# Altium PCB AT89S52单片机入门与提高_粗.PcbDoc (part 4 of 5)
Units mm, origin at the board's own origin, x right, y up, seen from the top; angles counter-clockwise.
Board outline 152.4 x 101.6 mm, 2 copper layers (Top Layer, Bottom Layer); 111 components, 112 nets, 451 pads, 42 vias.
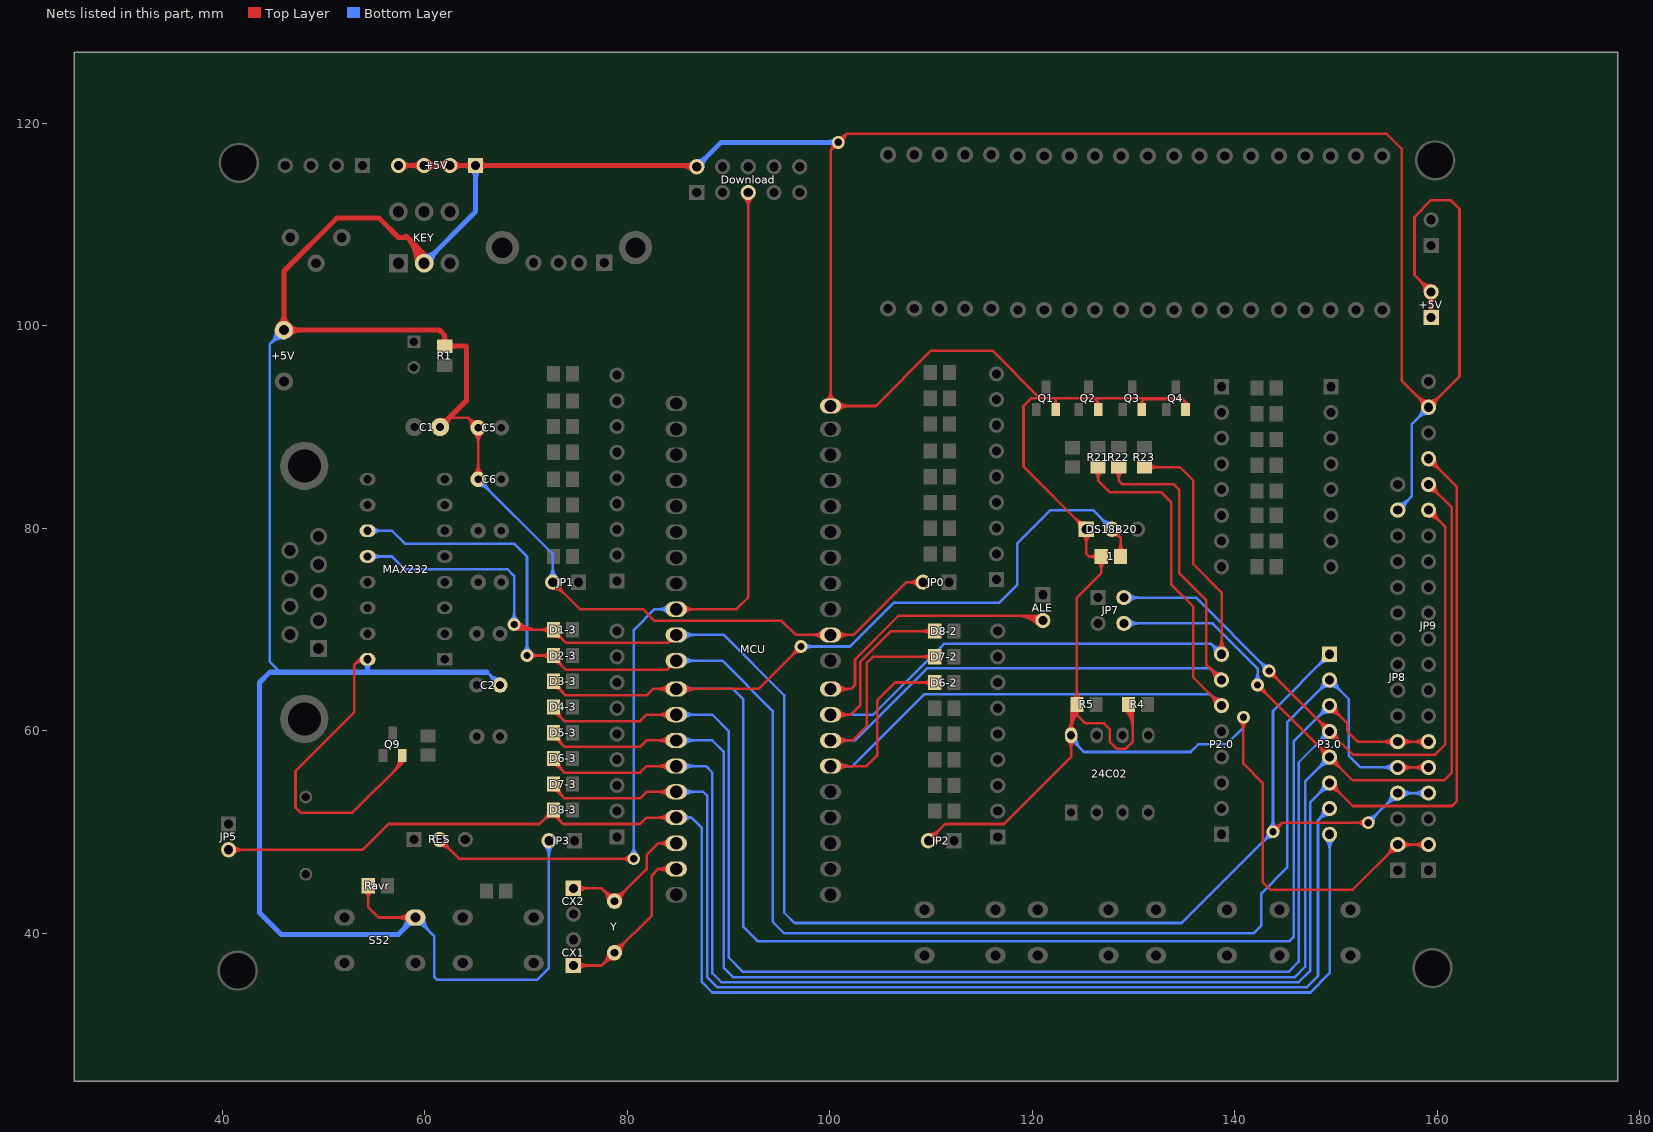
[diagram p4: the nets of this part, all layers, seen from the top]

## Via types
v1: diameter 1.27, hole 0.711, Top Layer to Bottom Layer, 42 vias

## Nets (pads, with @x,y where several pads share a name; then routed paths per layer and width w, separated by ;. In a path a pad name is that pad's centre, name@x,y a point inside that pad or via, vN(x,y) a via of type N, cw(c..) or ccw(c..) an arc to the next point about the centre after c; other vN are vias at no path point) (continued)
P2.5: D6-2.2 MCU.26 P2.0.6 R21.1 | length 117.1
  Top Layer w0.254: MCU.26@100.076,56.515 103.632,56.515 104.673,57.556 104.673,62.992 106.451,64.77 D6-2.2@110.368,64.77 ; MCU.26@100.639,56.252 cw(c101.273,55.618) 101.273,56.515 cw(c101.273,57.412) MCU.26@100.639,56.778 ; MCU.26@100.818,56.073 cw(c101.886,55.005) 101.886,56.515 cw(c101.886,58.025) MCU.26@100.818,56.957 ; D6-2.2@109.998,64.4 ccw(c109.105,63.507) 109.105,64.77 ccw(c109.105,66.033) D6-2.2@109.998,65.14 ; R21.1@126.122,85.675 cw(c125.229,84.782) 126.492,84.782 cw(c127.755,84.782) R21.1@126.862,85.675 ; R21.1@126.492,86.045 126.492,84.709 127.635,83.566 132.715,83.566 133.731,82.55 133.731,74.422 135.89,72.263 135.89,65.278 P2.0.6@138.684,62.484 ; P2.0.6@138.061,62.484 ccw(c136.557,62.484) 137.62,63.548 ccw(c138.684,64.611) P2.0.6@138.684,63.107 ; P2.0.6@138.315,62.484 ccw(c137.424,62.484) 138.054,63.114 ccw(c138.684,63.744) P2.0.6@138.684,62.853
  Bottom Layer w0.254: MCU.26@100.076,56.515 102.235,56.515 109.347,63.627 137.541,63.627 P2.0.6@138.684,62.484 ; 101.273,56.515 ccw(c101.273,55.618) 100.639,56.252 cw(c101.273,55.618) 101.273,56.515 ; 101.273,56.515 cw(c101.273,57.412) 100.639,56.778 ccw(c101.273,57.412) 101.273,56.515 ; 101.886,56.515 ccw(c101.886,55.005) 100.818,56.073 cw(c101.886,55.005) 101.886,56.515 ; 101.886,56.515 cw(c101.886,58.025) 100.818,56.957 ccw(c101.886,58.025) 101.886,56.515 ; 137.62,63.548 ccw(c138.684,64.611) 138.684,63.107 cw(c138.684,64.611) 137.62,63.548 ; 137.62,63.548 cw(c136.557,62.484) 138.061,62.484 ccw(c136.557,62.484) 137.62,63.548 ; 138.054,63.114 ccw(c138.684,63.744) 138.684,62.853 cw(c138.684,63.744) 138.054,63.114 ; 138.054,63.114 cw(c137.424,62.484) 138.315,62.484 ccw(c137.424,62.484) 138.054,63.114
P2.6: D7-2.2 MCU.27 P2.0.7 R22.1 | length 114.2
  Top Layer w0.254: MCU.27@100.076,59.055 102.235,59.055 103.632,60.452 103.632,66.675 104.267,67.31 D7-2.2@110.368,67.31 ; MCU.27@100.639,58.792 cw(c101.273,58.158) 101.273,59.055 cw(c101.273,59.952) MCU.27@100.639,59.318 ; MCU.27@100.818,58.613 cw(c101.886,57.545) 101.886,59.055 cw(c101.886,60.565) MCU.27@100.818,59.497 ; D7-2.2@109.998,66.94 ccw(c109.105,66.047) 109.105,67.31 ccw(c109.105,68.573) D7-2.2@109.998,67.68 ; R22.1@128.154,85.675 cw(c127.261,84.782) 128.524,84.782 cw(c129.787,84.782) R22.1@128.894,85.675 ; R22.1@128.524,86.045 128.524,84.709 128.905,84.328 133.985,84.328 134.493,83.82 134.493,75.565 137.16,72.898 137.16,66.548 P2.0.7@138.684,65.024 ; P2.0.7@138.061,65.024 ccw(c136.557,65.024) 137.62,66.088 ccw(c138.684,67.151) P2.0.7@138.684,65.647 ; P2.0.7@138.315,65.024 ccw(c137.424,65.024) 138.054,65.654 ccw(c138.684,66.284) P2.0.7@138.684,65.393
  Bottom Layer w0.254: MCU.27@100.076,59.055 102.489,59.055 109.601,66.167 137.541,66.167 P2.0.7@138.684,65.024 ; 101.273,59.055 ccw(c101.273,58.158) 100.639,58.792 cw(c101.273,58.158) 101.273,59.055 ; 101.273,59.055 cw(c101.273,59.952) 100.639,59.318 ccw(c101.273,59.952) 101.273,59.055 ; 101.886,59.055 ccw(c101.886,57.545) 100.818,58.613 cw(c101.886,57.545) 101.886,59.055 ; 101.886,59.055 cw(c101.886,60.565) 100.818,59.497 ccw(c101.886,60.565) 101.886,59.055 ; 137.62,66.088 ccw(c138.684,67.151) 138.684,65.647 cw(c138.684,67.151) 137.62,66.088 ; 137.62,66.088 cw(c136.557,65.024) 138.061,65.024 ccw(c136.557,65.024) 137.62,66.088 ; 138.054,65.654 ccw(c138.684,66.284) 138.684,65.393 cw(c138.684,66.284) 138.054,65.654 ; 138.054,65.654 cw(c137.424,65.024) 138.315,65.024 ccw(c137.424,65.024) 138.054,65.654
P2.7: D8-2.2 MCU.28 P2.0.8 R23.1 | length 107.9
  Top Layer w0.254: MCU.28@100.076,61.595 102.108,61.595 102.997,62.484 102.997,66.802 106.045,69.85 D8-2.2@110.368,69.85 ; MCU.28@100.639,61.332 cw(c101.273,60.698) 101.273,61.595 cw(c101.273,62.492) MCU.28@100.639,61.858 ; MCU.28@100.818,61.153 cw(c101.886,60.085) 101.886,61.595 cw(c101.886,63.105) MCU.28@100.818,62.037 ; D8-2.2@109.998,69.48 ccw(c109.105,68.587) 109.105,69.85 ccw(c109.105,71.113) D8-2.2@109.998,70.22 ; R23.1@131.064,86.045 134.554,86.045 135.89,84.709 135.89,76.454 138.684,73.66 P2.0.8@138.684,67.564 ; R23.1@131.534,85.675 cw(c132.427,84.782) 132.427,86.045 cw(c132.427,87.308) R23.1@131.534,86.415 ; P2.0.8@138.243,68.005 ccw(c137.18,69.068) 138.684,69.068 ccw(c140.188,69.068) P2.0.8@139.125,68.005 ; P2.0.8@138.423,67.825 ccw(c137.793,68.455) 138.684,68.455 ccw(c139.575,68.455) P2.0.8@138.945,67.825
  Bottom Layer w0.254: MCU.28@100.076,61.595 104.292,61.595 111.277,68.58 137.668,68.58 ; P2.0.8@138.684,67.564 137.668,68.58 ; 101.273,61.595 ccw(c101.273,60.698) 100.639,61.332 cw(c101.273,60.698) 101.273,61.595 ; 101.273,61.595 cw(c101.273,62.492) 100.639,61.858 ccw(c101.273,62.492) 101.273,61.595 ; 101.886,61.595 ccw(c101.886,60.085) 100.818,61.153 cw(c101.886,60.085) 101.886,61.595 ; 101.886,61.595 cw(c101.886,63.105) 100.818,62.037 ccw(c101.886,63.105) 101.886,61.595 ; 137.668,68.58 ccw(c138.619,69.531) 138.664,68.187 cw(c138.619,69.531) 137.668,68.58 ; 137.668,68.58 cw(c136.717,67.629) 138.061,67.584 ccw(c136.717,67.629) 137.668,68.58 ; 138.082,68.166 ccw(c138.646,68.729) 138.672,67.933 cw(c138.646,68.729) 138.082,68.166 ; 138.082,68.166 cw(c137.519,67.602) 138.315,67.576 ccw(c137.519,67.602) 138.082,68.166
P3.0: D1-3.2 JP8.4 JP9.4 MAX232.12 MCU.10 P3.0.1 | length 233.9
  Top Layer w0.254: v1@68.654,70.305 ccw(c69.447,71.098) 69.447,69.977 ; v1@69.014,70.665 ccw(c70.674,72.325) 70.674,69.977 ; v1@69.193,70.844 ccw(c71.287,72.938) 71.287,69.977 ; 70.06,69.977 cw(c70.06,71.711) v1(68.834,70.485) 69.342,69.977 ; D1-3.2@72.34,69.607 ccw(c71.447,68.714) 71.447,69.977 ccw(c71.447,71.24) D1-3.2@72.34,70.347 ; D1-3.2@72.71,69.354 cw(c72.71,68.009) 73.661,68.96 ; D1-3.2@72.71,69.608 cw(c72.71,68.876) D1-3.2@73.227,69.394 ; D1-3.2@73.233,69.877 ccw(c74.414,69.877) 73.579,69.042 ; MCU.10@84.832,69.468 84.071,68.707 73.914,68.707 72.71,69.911 D1-3.2@72.71,69.977 69.342,69.977 ; v1(143.764,50.038) 144.653,50.927 v1(153.162,50.927) ; v1@143.764,50.546 ccw(c143.764,51.772) 144.631,50.905 ccw(c145.498,50.038) v1@144.272,50.038 ; v1@152.803,50.568 ccw(c151.936,49.701) 151.936,50.927 ccw(c151.936,52.153) v1@152.803,51.286 ; 69.342,69.977 ccw(c69.162,69.797) 69.053,70.027 cw(c69.162,69.797) 69.342,69.977 ; 69.342,69.977 cw(c69.522,70.157) 69.292,70.266 ccw(c69.522,70.157) 69.342,69.977
  Bottom Layer w0.254: MAX232.12@54.36,77.217 56.768,77.217 58.039,75.946 68.199,75.946 68.834,75.311 v1(68.834,70.485) ; MCU.10@84.832,69.468 89.536,69.468 95.504,63.5 95.504,42.037 96.52,41.021 134.747,41.021 v1(143.764,50.038) 143.764,61.976 P3.0.1@149.352,67.564 ; v1(153.162,50.927) JP8.4@156.083,53.848 JP9.4@159.131,53.848 ; 55.724,77.217 ccw(c55.724,76.015) 54.874,76.865 cw(c55.724,76.015) 55.724,77.217 ; 55.724,77.217 cw(c55.724,78.419) 54.874,77.569 ccw(c55.724,78.419) 55.724,77.217 ; 68.834,71.711 ccw(c70.06,71.711) 69.193,70.844 cw(c70.06,71.711) 68.834,71.711 ; 68.834,71.711 cw(c67.608,71.711) 68.475,70.844 ccw(c67.608,71.711) 68.834,71.711 ; 86.029,69.468 ccw(c86.029,68.571) 85.395,69.205 cw(c86.029,68.571) 86.029,69.468 ; 86.029,69.468 cw(c86.029,70.365) 85.395,69.731 ccw(c86.029,70.365) 86.029,69.468 ; 86.642,69.468 ccw(c86.642,67.958) 85.574,69.026 cw(c86.642,67.958) 86.642,69.468 ; 86.642,69.468 cw(c86.642,70.978) 85.574,69.91 ccw(c86.642,70.978) 86.642,69.468 ; 142.897,49.171 ccw(c142.03,50.038) 143.256,50.038 cw(c142.03,50.038) 142.897,49.171 ; 142.897,49.171 cw(c143.764,48.304) 143.764,49.53 ccw(c143.764,48.304) 142.897,49.171 ; 143.764,51.264 ccw(c144.99,51.264) 144.123,50.397 cw(c144.99,51.264) 143.764,51.264 ; 143.764,51.264 cw(c142.538,51.264) 143.405,50.397 ccw(c142.538,51.264) 143.764,51.264 ; 148.288,66.5 ccw(c147.225,67.564) 148.729,67.564 cw(c147.225,67.564) 148.288,66.5 ; 148.288,66.5 cw(c149.352,65.437) 149.352,66.941 ccw(c149.352,65.437) 148.288,66.5 ; P3.0.1@148.722,66.934 ccw(c148.092,67.564) 148.983,67.564 cw(c148.092,67.564) P3.0.1@148.722,66.934 ; P3.0.1@148.722,66.934 cw(c149.352,66.304) 149.352,67.195 ccw(c149.352,66.304) P3.0.1@148.722,66.934 ; 154.029,51.794 ccw(c154.896,50.927) 153.67,50.927 cw(c154.896,50.927) 154.029,51.794 ; 154.029,51.794 cw(c153.162,52.661) 153.162,51.435 ccw(c153.162,52.661) 154.029,51.794 ; 155.019,52.784 ccw(c153.956,53.848) 155.46,53.848 cw(c153.956,53.848) 155.019,52.784 ; 155.019,52.784 cw(c156.083,51.721) 156.083,53.225 ccw(c156.083,51.721) 155.019,52.784 ; 155.453,53.218 ccw(c154.823,53.848) 155.714,53.848 cw(c154.823,53.848) 155.453,53.218 ; 155.453,53.218 cw(c156.083,52.588) 156.083,53.479 ccw(c156.083,52.588) 155.453,53.218 ; 156.974,53.848 ccw(c156.974,52.957) 156.344,53.587 cw(c156.974,52.957) 156.974,53.848 ; 156.974,53.848 cw(c156.974,54.739) 156.344,54.109 ccw(c156.974,54.739) 156.974,53.848 ; 157.587,53.848 ccw(c157.587,52.344) 156.524,53.407 cw(c157.587,52.344) 157.587,53.848 ; 157.587,53.848 cw(c157.587,55.352) 156.524,54.289 ccw(c157.587,55.352) 157.587,53.848 ; 157.627,53.848 ccw(c157.627,55.352) 158.69,54.289 cw(c157.627,55.352) 157.627,53.848 ; 157.627,53.848 cw(c157.627,52.344) 158.69,53.407 ccw(c157.627,52.344) 157.627,53.848 ; 158.24,53.848 ccw(c158.24,54.739) 158.87,54.109 cw(c158.24,54.739) 158.24,53.848 ; 158.24,53.848 cw(c158.24,52.957) 158.87,53.587 ccw(c158.24,52.957) 158.24,53.848
P3.1: D2-3.2 JP8.5 JP9.5 MAX232.11 MCU.11 P3.0.2 | length 220.1
  Top Layer w0.254: v1(70.104,67.437) D2-3.2@72.71,67.437 72.71,67.244 73.914,66.04 83.944,66.04 MCU.11@84.832,66.928 ; v1@70.463,67.078 cw(c71.33,66.211) 71.33,67.437 cw(c71.33,68.663) v1@70.463,67.796 ; D2-3.2@72.34,67.067 ccw(c71.447,66.174) 71.447,67.437 ccw(c71.447,68.7) D2-3.2@72.34,67.807 ; D2-3.2@72.71,66.814 cw(c72.71,65.776) 73.444,66.51 ; D2-3.2@72.979,67.337 ccw(c73.853,67.337) D2-3.2@73.235,66.719 ; D2-3.2@73.233,67.337 ccw(c74.72,67.337) 73.669,66.285 ; JP8.5@156.083,56.388 JP9.5@159.131,56.388 ; JP8.5@156.344,56.127 cw(c156.974,55.497) 156.974,56.388 cw(c156.974,57.279) JP8.5@156.344,56.649 ; JP8.5@156.524,55.947 cw(c157.587,54.884) 157.587,56.388 cw(c157.587,57.892) JP8.5@156.524,56.829 ; JP9.5@158.69,55.947 ccw(c157.627,54.884) 157.627,56.388 ccw(c157.627,57.892) JP9.5@158.69,56.829 ; JP9.5@158.87,56.127 ccw(c158.24,55.497) 158.24,56.388 ccw(c158.24,57.279) JP9.5@158.87,56.649 ; 84.094,66.19 cw(c84.39,65.895) 84.447,66.308 ccw(c84.39,65.895) 84.094,66.19
  Bottom Layer w0.254: MAX232.11@54.36,79.757 56.768,79.757 58.039,78.486 68.834,78.486 70.104,77.216 v1(70.104,67.437) ; MCU.11@84.832,66.928 89.409,66.928 94.361,61.976 94.361,41.148 95.504,40.005 141.859,40.005 142.621,40.767 142.621,43.942 145.161,46.482 145.161,60.833 P3.0.2@149.352,65.024 151.257,63.119 151.257,57.531 152.4,56.388 JP8.5@156.083,56.388 ; 55.724,79.757 ccw(c55.724,78.555) 54.874,79.405 cw(c55.724,78.555) 55.724,79.757 ; 55.724,79.757 cw(c55.724,80.959) 54.874,80.109 ccw(c55.724,80.959) 55.724,79.757 ; 70.104,68.663 ccw(c71.33,68.663) 70.463,67.796 cw(c71.33,68.663) 70.104,68.663 ; 70.104,68.663 cw(c68.878,68.663) 69.745,67.796 ccw(c68.878,68.663) 70.104,68.663 ; 86.029,66.928 ccw(c86.029,66.031) 85.395,66.665 cw(c86.029,66.031) 86.029,66.928 ; 86.029,66.928 cw(c86.029,67.825) 85.395,67.191 ccw(c86.029,67.825) 86.029,66.928 ; 86.642,66.928 ccw(c86.642,65.418) 85.574,66.486 cw(c86.642,65.418) 86.642,66.928 ; 86.642,66.928 cw(c86.642,68.438) 85.574,67.37 ccw(c86.642,68.438) 86.642,66.928 ; 148.288,63.96 ccw(c147.225,65.024) 148.729,65.024 cw(c147.225,65.024) 148.288,63.96 ; 148.288,63.96 cw(c149.352,62.897) P3.0.2@149.352,64.401 ; 148.288,63.96 cw(c149.352,62.897) P3.0.2@149.352,64.401 ; 148.722,64.394 ccw(c148.092,65.024) 148.983,65.024 cw(c148.092,65.024) 148.722,64.394 ; 148.722,64.394 cw(c149.352,63.764) P3.0.2@149.352,64.655 ; 148.722,64.394 cw(c149.352,63.764) P3.0.2@149.352,64.655 ; P3.0.2@149.352,64.401 cw(c149.352,62.897) 150.416,63.96 ; P3.0.2@149.352,64.401 cw(c149.352,62.897) 150.416,63.96 ; P3.0.2@149.352,64.655 cw(c149.352,63.764) 149.982,64.394 ; P3.0.2@149.352,64.655 cw(c149.352,63.764) 149.982,64.394 ; 149.982,64.394 cw(c150.612,65.024) 149.721,65.024 ccw(c150.612,65.024) 149.982,64.394 ; 150.416,63.96 cw(c151.479,65.024) 149.975,65.024 ccw(c151.479,65.024) 150.416,63.96 ; 154.579,56.388 ccw(c154.579,57.892) 155.642,56.829 cw(c154.579,57.892) 154.579,56.388 ; 154.579,56.388 cw(c154.579,54.884) 155.642,55.947 ccw(c154.579,54.884) 154.579,56.388 ; 155.192,56.388 ccw(c155.192,57.279) 155.822,56.649 cw(c155.192,57.279) 155.192,56.388 ; 155.192,56.388 cw(c155.192,55.497) 155.822,56.127 ccw(c155.192,55.497) 155.192,56.388
P3.2: 1.1 D3-3.2 DS18B20.2 JP8.6 JP9.6 MCU.12 P3.0.3 | length 247.5
  Top Layer w0.254: D3-3.2@72.71,64.274 cw(c72.71,63.236) 73.444,63.97 ; D3-3.2@72.71,64.897 72.71,64.704 73.914,63.5 81.915,63.5 82.55,64.135 MCU.12@84.836,64.135 92.964,64.135 v1(97.155,68.326) ; D3-3.2@72.979,64.797 ccw(c73.853,64.797) D3-3.2@73.235,64.179 ; D3-3.2@73.233,64.797 ccw(c74.72,64.797) 73.669,63.745 ; MCU.12@84.094,63.693 ccw(c83.026,62.625) 83.026,64.135 ccw(c83.026,65.645) MCU.12@84.094,64.577 ; MCU.12@84.273,63.872 ccw(c83.639,63.238) 83.639,64.135 ccw(c83.639,65.032) MCU.12@84.273,64.398 ; MCU.12@85.399,63.872 cw(c86.033,63.238) 86.033,64.135 cw(c86.033,65.032) MCU.12@85.399,64.398 ; MCU.12@85.578,63.693 cw(c86.646,62.625) 86.646,64.135 cw(c86.646,65.645) MCU.12@85.578,64.577 ; v1@96.647,68.326 cw(c95.421,68.326) 96.288,67.459 cw(c97.155,66.592) v1@97.155,67.818 ; DS18B20.2@127.859,79.905 128.712,79.052 ; DS18B20.2@127.963,79.291 cw(c128.106,78.446) 128.712,79.052 ; 1.1@128.342,77.686 ccw(c127.449,78.579) 128.712,78.579 ccw(c129.975,78.579) 1.1@129.082,77.686 ; DS18B20.2@128.473,79.801 ccw(c129.318,79.658) 128.712,79.052 ; 1.1@128.712,77.216 128.712,79.052 ; P3.0.3@149.352,61.861 cw(c149.352,60.357) 150.416,61.42 cw(c151.479,62.484) P3.0.3@149.975,62.484 ; P3.0.3@149.352,62.115 cw(c149.352,61.224) 149.982,61.854 cw(c150.612,62.484) P3.0.3@149.721,62.484 ; P3.0.3@149.352,62.484 151.105,60.731 151.105,59.944 152.121,58.928 JP8.6@156.083,58.928 JP9.6@159.131,58.928 ; JP8.6@155.642,58.487 ccw(c154.579,57.424) 154.579,58.928 ccw(c154.579,60.432) JP8.6@155.642,59.369 ; JP8.6@155.822,58.667 ccw(c155.192,58.037) 155.192,58.928 ccw(c155.192,59.819) JP8.6@155.822,59.189 ; JP8.6@156.344,58.667 cw(c156.974,58.037) 156.974,58.928 cw(c156.974,59.819) JP8.6@156.344,59.189 ; JP8.6@156.524,58.487 cw(c157.587,57.424) 157.587,58.928 cw(c157.587,60.432) JP8.6@156.524,59.369 ; JP9.6@158.69,58.487 ccw(c157.627,57.424) 157.627,58.928 ccw(c157.627,60.432) JP9.6@158.69,59.369 ; JP9.6@158.87,58.667 ccw(c158.24,58.037) 158.24,58.928 ccw(c158.24,59.819) JP9.6@158.87,59.189
  Bottom Layer w0.254: MCU.12@84.836,64.135 90.424,64.135 91.465,63.094 91.465,40.64 92.862,39.243 145.415,39.243 145.796,39.624 145.796,58.928 P3.0.3@149.352,62.484 ; v1(97.155,68.326) 101.981,68.326 106.299,72.644 116.713,72.644 118.491,74.422 118.491,78.486 121.793,81.788 125.976,81.788 DS18B20.2@127.859,79.905 ; 86.033,64.135 ccw(c86.033,63.238) 85.399,63.872 cw(c86.033,63.238) 86.033,64.135 ; 86.033,64.135 cw(c86.033,65.032) 85.399,64.398 ccw(c86.033,65.032) 86.033,64.135 ; 86.646,64.135 ccw(c86.646,62.625) 85.578,63.693 cw(c86.646,62.625) 86.646,64.135 ; 86.646,64.135 cw(c86.646,65.645) 85.578,64.577 ccw(c86.646,65.645) 86.646,64.135 ; 98.381,68.326 ccw(c98.381,67.1) 97.514,67.967 cw(c98.381,67.1) 98.381,68.326 ; 98.381,68.326 cw(c98.381,69.552) 97.514,68.685 ccw(c98.381,69.552) 98.381,68.326 ; 126.795,80.969 ccw(c127.859,82.032) 127.859,80.528 cw(c127.859,82.032) 126.795,80.969 ; 126.795,80.969 cw(c125.732,79.905) 127.236,79.905 ccw(c125.732,79.905) 126.795,80.969 ; 127.229,80.535 ccw(c127.859,81.165) 127.859,80.274 cw(c127.859,81.165) 127.229,80.535 ; 127.229,80.535 cw(c126.599,79.905) 127.49,79.905 ccw(c126.599,79.905) 127.229,80.535 ; 148.288,61.42 ccw(c147.225,62.484) 148.729,62.484 cw(c147.225,62.484) 148.288,61.42 ; 148.288,61.42 cw(c149.352,60.357) 149.352,61.861 ccw(c149.352,60.357) 148.288,61.42 ; 148.722,61.854 ccw(c148.092,62.484) 148.983,62.484 cw(c148.092,62.484) 148.722,61.854 ; 148.722,61.854 cw(c149.352,61.224) 149.352,62.115 ccw(c149.352,61.224) 148.722,61.854
P3.3: D4-3.2 JP7.2 JP9.15 MCU.13 P3.0.4 | length 231.2
  Top Layer w0.254: D4-3.2@72.71,61.734 cw(c72.71,61.002) 73.227,61.52 ; D4-3.2@72.71,62.357 72.71,62.037 73.787,60.96 81.28,60.96 81.915,61.595 MCU.13@84.836,61.595 ; D4-3.2@72.979,62.243 ccw(c73.99,62.189) 73.274,61.473 ; D4-3.2@73.232,62.229 ccw(c74.756,62.149) 73.677,61.07 ; MCU.13@84.094,61.153 ccw(c83.026,60.085) 83.026,61.595 ccw(c83.026,63.105) MCU.13@84.094,62.037 ; MCU.13@84.273,61.332 ccw(c83.639,60.698) 83.639,61.595 ccw(c83.639,62.492) MCU.13@84.273,61.858 ; v1@143.383,65.405 cw(c143.383,64.179) 144.25,65.046 cw(c145.117,65.913) v1@143.891,65.913 ; v1(143.383,65.913) P3.0.4@149.352,59.944 151.638,57.658 159.766,57.658 160.782,58.674 160.782,80.137 JP9.15@159.131,81.788 ; P3.0.4@148.729,59.944 ccw(c147.225,59.944) 148.288,61.008 ccw(c149.352,62.071) P3.0.4@149.352,60.567 ; P3.0.4@148.983,59.944 ccw(c148.092,59.944) 148.722,60.574 ccw(c149.352,61.204) P3.0.4@149.352,60.313 ; P3.0.4@149.352,59.321 cw(c149.352,57.817) 150.416,58.88 cw(c151.479,59.944) P3.0.4@149.975,59.944 ; P3.0.4@149.352,59.575 cw(c149.352,58.684) 149.982,59.314 cw(c150.612,59.944) P3.0.4@149.721,59.944 ; JP9.15@159.131,81.165 cw(c159.131,79.661) 160.195,80.724 cw(c161.258,81.788) JP9.15@159.754,81.788 ; JP9.15@159.131,81.419 cw(c159.131,80.528) 159.761,81.158 cw(c160.391,81.788) JP9.15@159.5,81.788
  Bottom Layer w0.254: MCU.13@84.836,61.595 88.392,61.595 90.043,59.944 90.043,37.592 91.44,36.195 145.288,36.195 146.304,37.211 146.304,56.896 P3.0.4@149.352,59.944 ; JP7.2@129.032,73.152 136.144,73.152 v1(143.383,65.913) ; 86.033,61.595 ccw(c86.033,60.698) 85.399,61.332 cw(c86.033,60.698) 86.033,61.595 ; 86.033,61.595 cw(c86.033,62.492) 85.399,61.858 ccw(c86.033,62.492) 86.033,61.595 ; 86.646,61.595 ccw(c86.646,60.085) 85.578,61.153 cw(c86.646,60.085) 86.646,61.595 ; 86.646,61.595 cw(c86.646,63.105) 85.578,62.037 ccw(c86.646,63.105) 86.646,61.595 ; 129.923,73.152 ccw(c129.923,72.261) 129.293,72.891 cw(c129.923,72.261) 129.923,73.152 ; 129.923,73.152 cw(c129.923,74.043) 129.293,73.413 ccw(c129.923,74.043) 129.923,73.152 ; 130.536,73.152 ccw(c130.536,71.648) 129.473,72.711 cw(c130.536,71.648) 130.536,73.152 ; 130.536,73.152 cw(c130.536,74.656) 129.473,73.593 ccw(c130.536,74.656) 130.536,73.152 ; 142.516,66.78 ccw(c143.383,67.647) 143.383,66.421 cw(c143.383,67.647) 142.516,66.78 ; 142.516,66.78 cw(c141.649,65.913) 142.875,65.913 ccw(c141.649,65.913) 142.516,66.78 ; 148.288,58.88 ccw(c147.225,59.944) 148.729,59.944 cw(c147.225,59.944) 148.288,58.88 ; 148.288,58.88 cw(c149.352,57.817) 149.352,59.321 ccw(c149.352,57.817) 148.288,58.88 ; 148.722,59.314 ccw(c148.092,59.944) 148.983,59.944 cw(c148.092,59.944) 148.722,59.314 ; 148.722,59.314 cw(c149.352,58.684) 149.352,59.575 ccw(c149.352,58.684) 148.722,59.314
P3.4: D5-3.2 JP7.4 JP9.16 MCU.14 P3.0.5 | length 235.2
  Top Layer w0.254: D5-3.2@72.71,59.194 cw(c72.71,58.462) 73.227,58.98 ; D5-3.2@72.71,59.817 72.71,59.497 73.787,58.42 81.28,58.42 81.915,59.055 MCU.14@84.836,59.055 ; D5-3.2@72.979,59.703 ccw(c73.99,59.649) 73.274,58.933 ; D5-3.2@73.232,59.689 ccw(c74.756,59.609) 73.677,58.53 ; MCU.14@84.094,58.613 ccw(c83.026,57.545) 83.026,59.055 ccw(c83.026,60.565) MCU.14@84.094,59.497 ; MCU.14@84.273,58.792 ccw(c83.639,58.158) 83.639,59.055 ccw(c83.639,59.952) MCU.14@84.273,59.318 ; v1@142.24,64.008 cw(c142.24,62.782) 143.107,63.649 cw(c143.974,64.516) v1@142.748,64.516 ; v1(142.24,64.516) P3.0.5@149.352,57.404 151.638,55.118 160.655,55.118 161.417,55.88 161.417,82.042 JP9.16@159.131,84.328 ; P3.0.5@148.729,57.404 ccw(c147.225,57.404) 148.288,58.468 ccw(c149.352,59.531) P3.0.5@149.352,58.027 ; P3.0.5@148.983,57.404 ccw(c148.092,57.404) 148.722,58.034 ccw(c149.352,58.664) P3.0.5@149.352,57.773 ; P3.0.5@149.352,56.781 cw(c149.352,55.277) 150.416,56.34 cw(c151.479,57.404) P3.0.5@149.975,57.404 ; P3.0.5@149.352,57.035 cw(c149.352,56.144) 149.982,56.774 cw(c150.612,57.404) P3.0.5@149.721,57.404 ; JP9.16@159.131,83.705 cw(c159.131,82.201) 160.195,83.264 cw(c161.258,84.328) JP9.16@159.754,84.328 ; JP9.16@159.131,83.959 cw(c159.131,83.068) 159.761,83.698 cw(c160.391,84.328) JP9.16@159.5,84.328
  Bottom Layer w0.254: MCU.14@84.836,59.055 88.392,59.055 89.535,57.912 89.535,36.576 90.424,35.687 145.923,35.687 146.939,36.703 146.939,54.991 P3.0.5@149.352,57.404 ; JP7.4@129.032,70.612 137.795,70.612 142.24,66.167 v1(142.24,64.516) ; 86.033,59.055 ccw(c86.033,58.158) 85.399,58.792 cw(c86.033,58.158) 86.033,59.055 ; 86.033,59.055 cw(c86.033,59.952) 85.399,59.318 ccw(c86.033,59.952) 86.033,59.055 ; 86.646,59.055 ccw(c86.646,57.545) 85.578,58.613 cw(c86.646,57.545) 86.646,59.055 ; 86.646,59.055 cw(c86.646,60.565) 85.578,59.497 ccw(c86.646,60.565) 86.646,59.055 ; 129.923,70.612 ccw(c129.923,69.721) 129.293,70.351 cw(c129.923,69.721) 129.923,70.612 ; 129.923,70.612 cw(c129.923,71.503) 129.293,70.873 ccw(c129.923,71.503) 129.923,70.612 ; 130.536,70.612 ccw(c130.536,69.108) 129.473,70.171 cw(c130.536,69.108) 130.536,70.612 ; 130.536,70.612 cw(c130.536,72.116) 129.473,71.053 ccw(c130.536,72.116) 130.536,70.612 ; 142.24,65.742 ccw(c143.466,65.742) 142.599,64.875 cw(c143.466,65.742) 142.24,65.742 ; 142.24,65.742 cw(c141.014,65.742) 141.881,64.875 ccw(c141.014,65.742) 142.24,65.742 ; 148.288,56.34 ccw(c147.225,57.404) 148.729,57.404 cw(c147.225,57.404) 148.288,56.34 ; 148.288,56.34 cw(c149.352,55.277) 149.352,56.781 ccw(c149.352,55.277) 148.288,56.34 ; 148.722,56.774 ccw(c148.092,57.404) 148.983,57.404 cw(c148.092,57.404) 148.722,56.774 ; 148.722,56.774 cw(c149.352,56.144) 149.352,57.035 ccw(c149.352,56.144) 148.722,56.774
P3.5: D6-3.2 JP9.17 MCU.15 P3.0.6 | length 193.8
  Top Layer w0.254: D6-3.2@72.71,56.654 cw(c72.71,55.922) 73.227,56.44 ; D6-3.2@72.71,57.277 72.71,56.957 73.787,55.88 81.28,55.88 81.915,56.515 MCU.15@84.836,56.515 ; D6-3.2@72.979,57.163 ccw(c73.99,57.109) 73.274,56.393 ; D6-3.2@73.232,57.149 ccw(c74.756,57.069) 73.677,55.99 ; MCU.15@84.094,56.073 ccw(c83.026,55.005) 83.026,56.515 ccw(c83.026,58.025) MCU.15@84.094,56.957 ; MCU.15@84.273,56.252 ccw(c83.639,55.618) 83.639,56.515 ccw(c83.639,57.412) MCU.15@84.273,56.778 ; P3.0.6@149.352,54.241 cw(c149.352,52.737) 150.416,53.8 cw(c151.479,54.864) P3.0.6@149.975,54.864 ; P3.0.6@149.352,54.495 cw(c149.352,53.604) 149.982,54.234 cw(c150.612,54.864) P3.0.6@149.721,54.864 ; P3.0.6@149.352,54.864 151.638,52.578 161.417,52.578 161.925,53.086 161.925,84.074 JP9.17@159.131,86.868 ; JP9.17@159.131,86.245 cw(c159.131,84.741) 160.195,85.804 cw(c161.258,86.868) JP9.17@159.754,86.868 ; JP9.17@159.131,86.499 cw(c159.131,85.608) 159.761,86.238 cw(c160.391,86.868) JP9.17@159.5,86.868
  Bottom Layer w0.254: MCU.15@84.836,56.515 87.757,56.515 88.392,55.88 88.392,36.068 89.281,35.179 146.304,35.179 147.447,36.322 147.447,52.959 P3.0.6@149.352,54.864 ; 86.033,56.515 ccw(c86.033,55.618) 85.399,56.252 cw(c86.033,55.618) 86.033,56.515 ; 86.033,56.515 cw(c86.033,57.412) 85.399,56.778 ccw(c86.033,57.412) 86.033,56.515 ; 86.646,56.515 ccw(c86.646,55.005) 85.578,56.073 cw(c86.646,55.005) 86.646,56.515 ; 86.646,56.515 cw(c86.646,58.025) 85.578,56.957 ccw(c86.646,58.025) 86.646,56.515 ; 148.288,53.8 ccw(c147.225,54.864) 148.729,54.864 cw(c147.225,54.864) 148.288,53.8 ; 148.288,53.8 cw(c149.352,52.737) 149.352,54.241 ccw(c149.352,52.737) 148.288,53.8 ; 148.722,54.234 ccw(c148.092,54.864) 148.983,54.864 cw(c148.092,54.864) 148.722,54.234 ; 148.722,54.234 cw(c149.352,53.604) 149.352,54.495 ccw(c149.352,53.604) 148.722,54.234
P3.6: D7-3.2 MCU.16 P3.0.7 | length 134
  Top Layer w0.254: D7-3.2@72.71,54.114 cw(c72.71,53.382) 73.227,53.9 ; D7-3.2@72.71,54.737 72.71,54.417 73.787,53.34 81.28,53.34 81.915,53.975 MCU.16@84.836,53.975 ; D7-3.2@72.979,54.623 ccw(c73.99,54.569) 73.274,53.853 ; D7-3.2@73.232,54.609 ccw(c74.756,54.529) 73.677,53.45 ; MCU.16@84.094,53.533 ccw(c83.026,52.465) 83.026,53.975 ccw(c83.026,55.485) MCU.16@84.094,54.417 ; MCU.16@84.273,53.712 ccw(c83.639,53.078) 83.639,53.975 ccw(c83.639,54.872) MCU.16@84.273,54.238
  Bottom Layer w0.254: MCU.16@84.836,53.975 87.503,53.975 87.884,53.594 87.884,35.687 88.9,34.671 147.066,34.671 148.209,35.814 148.209,51.181 P3.0.7@149.352,52.324 ; 86.033,53.975 ccw(c86.033,53.078) 85.399,53.712 cw(c86.033,53.078) 86.033,53.975 ; 86.033,53.975 cw(c86.033,54.872) 85.399,54.238 ccw(c86.033,54.872) 86.033,53.975 ; 86.646,53.975 ccw(c86.646,52.465) 85.578,53.533 cw(c86.646,52.465) 86.646,53.975 ; 86.646,53.975 cw(c86.646,55.485) 85.578,54.417 ccw(c86.646,55.485) 86.646,53.975 ; 148.288,51.26 ccw(c147.225,52.324) 148.729,52.324 cw(c147.225,52.324) 148.288,51.26 ; 148.288,51.26 cw(c149.352,50.197) 149.352,51.701 ccw(c149.352,50.197) 148.288,51.26 ; 148.722,51.694 ccw(c148.092,52.324) 148.983,52.324 cw(c148.092,52.324) 148.722,51.694 ; 148.722,51.694 cw(c149.352,51.064) 149.352,51.955 ccw(c149.352,51.064) 148.722,51.694
P3.7: D8-3.2 JP5.2 MCU.17 P3.0.8 | length 167.6
  Top Layer w0.254: JP5.2@40.64,48.26 53.899,48.26 56.439,50.8 71.313,50.8 D8-3.2@72.71,52.197 72.71,51.75 73.66,50.8 81.28,50.8 81.915,51.435 MCU.17@84.836,51.435 ; JP5.2@40.901,47.999 cw(c41.531,47.369) 41.531,48.26 cw(c41.531,49.151) JP5.2@40.901,48.521 ; JP5.2@41.081,47.819 cw(c42.144,46.756) 42.144,48.26 cw(c42.144,49.764) JP5.2@41.081,48.701 ; 71.646,51.133 cw(c72.71,50.07) D8-3.2@72.71,51.574 ; 71.888,51.375 ccw(c71.166,52.097) D8-3.2@72.187,52.097 ; D8-3.2@72.08,51.567 cw(c72.71,50.937) D8-3.2@72.71,51.828 ; MCU.17@84.094,50.993 ccw(c83.026,49.925) 83.026,51.435 ccw(c83.026,52.945) MCU.17@84.094,51.877 ; MCU.17@84.273,51.172 ccw(c83.639,50.538) 83.639,51.435 ccw(c83.639,52.332) MCU.17@84.273,51.698 ; D8-3.2@72.71,51.574 cw(c72.71,51.149) 73.01,51.45 ccw(c72.71,51.149) D8-3.2@72.71,51.574 ; D8-3.2@72.97,52.03 ccw(c73.72,51.835) 73.172,51.288 cw(c73.72,51.835) D8-3.2@72.97,52.03 ; D8-3.2@73.216,51.966 ccw(c74.219,51.706) 73.486,50.974 cw(c74.219,51.706) D8-3.2@73.216,51.966
  Bottom Layer w0.254: MCU.17@84.836,51.435 86.36,51.435 ; P3.0.8@149.352,49.784 149.352,36.068 147.447,34.163 88.392,34.163 87.376,35.179 87.376,50.419 86.36,51.435 ; 86.36,51.435 ccw(c86.36,50.55) 85.643,51.069 cw(c86.36,50.55) 86.36,51.435 ; 86.36,51.435 cw(c86.36,52.32) 85.643,51.801 ccw(c86.36,52.32) 86.36,51.435 ; 149.352,48.28 ccw(c147.848,48.28) 148.911,49.343 cw(c147.848,48.28) 149.352,48.28 ; 149.352,48.28 cw(c150.856,48.28) 149.793,49.343 ccw(c150.856,48.28) 149.352,48.28 ; 149.352,48.893 ccw(c148.461,48.893) 149.091,49.523 cw(c148.461,48.893) 149.352,48.893 ; 149.352,48.893 cw(c150.243,48.893) 149.613,49.523 ccw(c150.243,48.893) 149.352,48.893
PSEN: ALE.2 MCU.29 | length 36.4
  Top Layer w0.254: MCU.29@100.076,64.135 102.108,64.135 102.489,64.516 102.489,67.056 106.807,71.374 120.558,71.374 ALE.2@121.036,70.896 ; MCU.29@100.639,63.872 cw(c101.273,63.238) 101.273,64.135 cw(c101.273,65.032) MCU.29@100.639,64.398 ; MCU.29@100.818,63.693 cw(c101.886,62.625) 101.886,64.135 cw(c101.886,65.645) MCU.29@100.818,64.577 ; 118.378,71.374 cw(c118.378,68.238) ALE.2@120.595,70.455 ; 118.991,71.374 cw(c118.991,68.851) ALE.2@120.775,70.635 ; 119.604,71.374 cw(c119.604,69.464) ALE.2@120.955,70.815 ; 120.218,71.374 cw(c120.218,70.078) ALE.2@121.134,70.994
RES: Download.5 MCU.9 RES.2 | length 119.8
  Top Layer w0.254: RES.2@61.468,48.653 cw(c61.468,47.149) 62.532,48.212 cw(c63.595,49.276) RES.2@62.091,49.276 ; RES.2@61.468,48.907 cw(c61.468,48.016) 62.098,48.646 cw(c62.728,49.276) RES.2@61.837,49.276 ; RES.2@61.468,49.276 63.373,47.371 v1(80.645,47.371) ; v1@80.286,47.012 ccw(c79.419,46.145) 79.419,47.371 ccw(c79.419,48.597) v1@80.286,47.73 ; MCU.9@84.832,72.008 90.804,72.008 91.948,73.152 Download.5@91.948,113.157 ; MCU.9@85.395,71.745 cw(c86.029,71.111) 86.029,72.008 cw(c86.029,72.905) MCU.9@85.395,72.271 ; MCU.9@85.574,71.566 cw(c86.642,70.498) 86.642,72.008 cw(c86.642,73.518) MCU.9@85.574,72.45 ; Download.5@91.507,112.716 cw(c90.444,111.653) 91.948,111.653 cw(c93.452,111.653) Download.5@92.389,112.716 ; Download.5@91.687,112.896 cw(c91.057,112.266) 91.948,112.266 cw(c92.839,112.266) Download.5@92.209,112.896
  Bottom Layer w0.254: v1(80.645,47.371) 80.645,69.977 82.676,72.008 MCU.9@84.832,72.008 ; 80.645,48.597 ccw(c81.871,48.597) 81.004,47.73 cw(c81.871,48.597) 80.645,48.597 ; 80.645,48.597 cw(c79.419,48.597) 80.286,47.73 ccw(c79.419,48.597) 80.645,48.597 ; 83.022,72.008 ccw(c83.022,73.518) 84.09,72.45 cw(c83.022,73.518) 83.022,72.008 ; 83.022,72.008 cw(c83.022,70.498) 84.09,71.566 ccw(c83.022,70.498) 83.022,72.008 ; 83.636,72.008 ccw(c83.636,72.905) 84.27,72.271 cw(c83.636,72.905) 83.636,72.008 ; 83.636,72.008 cw(c83.636,71.111) 84.27,71.745 ccw(c83.636,71.111) 83.636,72.008
VCC: 1.2 24C02.8 +5V.1 +5V.2@62.484,115.824 +5V.2@159.38,103.348 +5V.3 +5V.4 C1.1 C2.1 C5.1 C6.2 Download.2 DS18B20.1 JP0.2 JP1.2 JP2.2 JP3.2 JP8.2 JP8.15 JP9.2 JP9.19 KEY.2 MAX232.16 MCU.31 MCU.40 Q1.2 Q2.2 Q3.2 Q4.2 Q9.2 R1.1 R4.2 R5.2 Ravr.2 S52.2 | length 998.4
  Top Layer w0.254: 53.053,66.541 cw(c53.832,65.761) MAX232.16@54.131,66.822 ; 53.36,66.847 cw(c53.967,66.24) MAX232.16@54.2,67.067 ; Ravr.2@54.052,44.234 cw(c53.159,43.341) 54.422,43.341 cw(c55.685,43.341) Ravr.2@54.792,44.234 ; MAX232.16@54.36,67.057 53.57,67.057 ; Ravr.2@54.422,44.704 54.422,42.606 55.459,41.569 S52.2@59.078,41.569 ; 56.927,55.987 ccw(c55.574,57.339) Q9.2@57.487,57.339 ; 57.36,56.42 ccw(c56.441,57.339) Q9.2@57.741,57.339 ; Q9.2@57.785,57.564 57.785,56.845 ; 57.794,56.854 ccw(c57.309,57.339) Q9.2@57.995,57.339 ; S52.2@58.402,41.093 ccw(c57.253,39.944) 57.253,41.569 ccw(c57.253,43.194) S52.2@58.402,42.045 ; S52.2@58.582,41.273 ccw(c57.866,40.558) 57.866,41.569 ccw(c57.866,42.581) S52.2@58.582,41.865 ; C1.1@61.519,89.992 62.459,90.932 ; C5.1@64.644,89.946 ccw(c63.337,90.007) 64.262,90.932 ; C6.2@64.829,85.285 ccw(c63.745,86.369) 65.278,86.369 ccw(c66.811,86.369) C6.2@65.727,85.285 ; C5.1@64.829,89.467 cw(c63.745,88.383) 65.278,88.383 cw(c66.811,88.383) C5.1@65.727,89.467 ; C5.1@64.897,89.934 ccw(c64.114,89.971) 64.668,90.526 ccw(c65.223,91.08) C5.1@65.26,90.297 ; C6.2@65.009,85.105 ccw(c64.358,85.756) 65.278,85.756 ccw(c66.198,85.756) C6.2@65.547,85.105 ; C5.1@65.009,89.647 cw(c64.358,88.996) 65.278,88.996 cw(c66.198,88.996) C5.1@65.547,89.647 ; +5V.1@65.024,115.824 86.741,115.824 Download.2@86.868,115.697 ; C5.1@65.248,90.55 cw(c65.187,91.857) 64.262,90.932 ; C6.2@65.278,84.836 C5.1@65.278,89.916 64.262,90.932 ; JP1.2@72.644,74.053 cw(c72.644,72.549) 73.708,73.612 cw(c74.771,74.676) JP1.2@73.267,74.676 ; JP1.2@72.644,74.307 cw(c72.644,73.416) 73.274,74.046 cw(c73.904,74.676) JP1.2@73.013,74.676 ; JP1.2@72.644,74.676 75.311,72.009 81.534,72.009 82.677,70.866 95.25,70.866 96.648,69.468 MCU.31@100.072,69.468 102.361,69.468 107.569,74.676 JP0.2@109.22,74.676 ; 85.057,115.824 cw(c85.057,113.886) Download.2@86.427,115.256 ; Download.2@86.427,116.138 cw(c85.671,116.894) 85.671,115.824 cw(c85.671,114.5) Download.2@86.607,115.436 ; MCU.31@99.33,69.026 ccw(c98.262,67.958) 98.262,69.468 ccw(c98.262,70.978) MCU.31@99.33,69.91 ; MCU.31@99.51,69.205 ccw(c98.876,68.571) 98.876,69.468 ccw(c98.876,70.365) MCU.31@99.51,69.731 ; MCU.40@99.634,92.517 ccw(c98.566,93.585) 100.076,93.585 ccw(c101.586,93.585) MCU.40@100.518,92.517 ; MCU.40@99.813,92.338 ccw(c99.179,92.972) 100.076,92.972 ccw(c100.973,92.972) MCU.40@100.339,92.338 ; v1@100.332,118.061 cw(c99.447,117.977) 100.076,117.348 ; MCU.31@100.635,69.205 cw(c101.269,68.571) 101.269,69.468 cw(c101.269,70.365) MCU.31@100.635,69.731 ; MCU.40@100.639,91.812 cw(c101.273,91.178) 101.273,92.075 cw(c101.273,92.972) MCU.40@100.639,92.338 ; v1@100.789,117.604 ccw(c100.705,116.719) 100.076,117.348 ; MCU.31@100.814,69.026 cw(c101.882,67.958) 101.882,69.468 cw(c101.882,70.978) MCU.31@100.814,69.91 ; MCU.40@100.818,91.633 cw(c101.886,90.565) 101.886,92.075 cw(c101.886,93.585) MCU.40@100.818,92.517 ; v1@100.846,118.618 ccw(c100.865,119.778) 101.686,118.958 ; v1@101.346,118.118 cw(c102.506,118.137) 101.686,118.958 ; JP0.2@108.779,74.235 ccw(c107.716,73.172) 107.716,74.676 ccw(c107.716,76.18) JP0.2@108.779,75.117 ; JP0.2@108.959,74.415 ccw(c108.329,73.785) 108.329,74.676 ccw(c108.329,75.567) JP0.2@108.959,74.937 ; JP2.2@109.728,49.149 111.379,50.8 117.221,50.8 123.826,57.405 24C02.8@123.826,59.559 123.826,62.027 124.399,62.6 124.399,61.57 ; JP2.2@109.728,49.518 ccw(c109.728,50.409) 110.358,49.779 ccw(c110.988,49.149) JP2.2@110.097,49.149 ; JP2.2@109.728,49.772 ccw(c109.728,51.276) 110.792,50.213 ccw(c111.855,49.149) JP2.2@110.351,49.149 ; Q1.2@122.301,91.727 122.301,92.71 122.428,92.837 119.888,92.837 ; 24C02.8@123.485,59.04 cw(c122.661,58.216) 123.826,58.216 cw(c124.991,58.216) 24C02.8@124.167,59.04 ; 24C02.8@123.485,60.078 ccw(c122.661,60.902) 123.826,60.902 ccw(c124.991,60.902) 24C02.8@124.167,60.078 ; 24C02.8@123.826,59.865 cw(c127.045,59.865) R5.2@124.769,62.141 ; 123.826,60.478 cw(c126.432,60.478) R5.2@124.589,62.321 ; 123.826,61.091 cw(c125.819,61.091) R5.2@124.41,62.5 ; 123.826,61.705 cw(c125.205,61.705) R5.2@124.23,62.68 ; R5.2@124.029,63.081 ccw(c123.136,63.974) 124.399,63.974 ccw(c125.662,63.974) R5.2@124.769,63.081 ; DS18B20.1@124.696,79.905 ccw(c123.192,79.905) 124.255,80.969 ccw(c125.319,82.032) DS18B20.1@125.319,80.528 ; DS18B20.1@124.878,79.464 cw(c123.815,78.401) 125.319,78.401 cw(c126.823,78.401) DS18B20.1@125.76,79.464 ; DS18B20.1@124.95,79.905 ccw(c124.059,79.905) 124.689,80.535 ccw(c125.319,81.165) DS18B20.1@125.319,80.274 ; DS18B20.1@125.058,79.644 cw(c124.428,79.014) 125.319,79.014 cw(c126.21,79.014) DS18B20.1@125.58,79.644 ; 1.2@126.431,76.858 ccw(c125.603,76.08) 125.603,77.216 ; 1.2@126.431,77.574 cw(c125.603,78.352) 125.603,77.216 ; 1.2@126.442,76.746 cw(c125.549,75.853) 126.812,75.853 cw(c128.075,75.853) 1.2@127.182,76.746 ; Q2.2@126.492,91.727 126.492,92.456 ; R4.2@129.109,62.141 cw(c127.149,60.181) 129.921,60.181 ; R4.2@129.289,62.321 cw(c127.762,60.794) 129.921,60.794 ; R4.2@129.468,62.5 cw(c128.376,61.408) 129.921,61.408 ; R4.2@129.479,62.611 129.921,62.611 129.921,58.928 129.235,58.242 128.321,58.242 127.635,58.928 127.635,60.173 127.076,60.731 125.237,60.731 124.399,61.57 ; R4.2@129.648,62.68 cw(c128.989,62.021) R4.2@129.921,62.021 ; Q3.2@130.81,91.727 130.81,92.507 ; Q4.2@135.128,91.727 135.128,92.456 ; v1@140.484,60.982 cw(c139.617,60.115) 140.843,60.115 cw(c142.069,60.115) v1@141.202,60.982 ; v1(140.843,61.341) 140.843,56.769 142.748,54.864 142.748,45.085 143.51,44.323 151.638,44.323 JP8.2@156.083,48.768 JP9.2@159.131,48.768 ; JP8.2@155.46,48.768 cw(c153.956,48.768) 155.019,47.704 cw(c156.083,46.641) JP8.2@156.083,48.145 ; JP8.2@155.714,48.768 cw(c154.823,48.768) 155.453,48.138 cw(c156.083,47.508) JP8.2@156.083,48.399 ; JP8.2@156.344,48.507 cw(c156.974,47.877) 156.974,48.768 cw(c156.974,49.659) JP8.2@156.344,49.029 ; JP8.2@156.524,48.327 cw(c157.587,47.264) 157.587,48.768 cw(c157.587,50.272) JP8.2@156.524,49.209 ; JP9.19@158.508,91.948 ccw(c157.004,91.948) 158.067,93.012 ccw(c159.131,94.075) 159.131,92.571 ccw(c159.131,94.075) 160.195,93.012 ccw(c161.258,91.948) JP9.19@159.754,91.948 ; JP9.2@158.69,48.327 ccw(c157.627,47.264) 157.627,48.768 ccw(c157.627,50.272) JP9.2@158.69,49.209 ; +5V.2@158.757,103.348 ccw(c157.253,103.348) 158.316,104.412 ccw(c159.38,105.475) +5V.2@159.38,103.971 ; JP9.19@158.762,91.948 ccw(c157.871,91.948) 158.501,92.578 ccw(c159.131,93.208) 159.131,92.317 ccw(c159.131,93.208) 159.761,92.578 ccw(c160.391,91.948) JP9.19@159.5,91.948 ; JP9.2@158.87,48.507 ccw(c158.24,47.877) 158.24,48.768 ccw(c158.24,49.659) JP9.2@158.87,49.029 ; +5V.1@158.939,101.249 ccw(c157.876,102.312) 159.38,102.312 ccw(c160.884,102.312) +5V.1@159.821,101.249 ; +5V.2@158.939,102.907 cw(c157.876,101.844) 159.38,101.844 cw(c160.884,101.844) +5V.2@159.821,102.907 ; +5V.2@159.011,103.348 ccw(c158.12,103.348) 158.75,103.978 ccw(c159.38,104.608) +5V.2@159.38,103.717 ; +5V.1@159.119,101.069 ccw(c158.489,101.699) 159.38,101.699 ccw(c160.271,101.699) +5V.1@159.641,101.069 ; +5V.2@159.119,103.087 cw(c158.489,102.457) 159.38,102.457 cw(c160.271,102.457) +5V.2@159.641,103.087 ; +5V.1@159.38,100.808 +5V.2@159.38,103.348 157.734,104.994 157.734,110.744 159.385,112.395 161.29,112.395 162.179,111.506 162.179,94.996 JP9.19@159.131,91.948 156.464,94.615 156.464,117.475 154.981,118.958 101.686,118.958 ; 53.57,67.057 ccw(c53.57,67.204) 53.712,67.17 cw(c53.57,67.204) 53.57,67.057 ; 53.57,67.057 cw(c53.57,66.91) 53.712,66.944 ccw(c53.57,66.91) 53.57,67.057 ; 53.57,67.057 53.061,66.548 53.061,61.849 47.244,56.032 47.244,52.426 47.752,51.918 52.857,51.918 57.785,56.845 ; 57.785,56.845 ccw(c57.524,56.845) 57.646,57.076 cw(c57.524,56.845) 57.785,56.845 ; 57.785,56.845 cw(c58.046,56.845) 57.924,57.076 ccw(c58.046,56.845) 57.785,56.845 ; 62.459,90.932 ccw(c62.993,90.397) 62.264,90.197 cw(c62.993,90.397) 62.459,90.932 ; 62.459,90.932 cw(c61.924,91.467) 61.724,90.738 ccw(c61.924,91.467) 62.459,90.932 ; 62.459,90.932 64.262,90.932 ; 65.915,115.824 ccw(c65.915,114.933) 65.285,115.563 cw(c65.915,114.933) 65.915,115.824 ; 65.915,115.824 cw(c65.915,116.715) 65.285,116.085 ccw(c65.915,116.715) 65.915,115.824 ; 66.528,115.824 ccw(c66.528,114.32) 65.465,115.383 cw(c66.528,114.32) 66.528,115.824 ; 66.528,115.824 cw(c66.528,117.328) 65.465,116.265 ccw(c66.528,117.328) 66.528,115.824 ; 100.076,117.348 MCU.40@100.076,92.075 104.546,92.075 110.007,97.536 116.078,97.536 120.777,92.837 119.888,92.837 ; 100.076,117.348 101.686,118.958 ; 119.888,92.837 119.126,92.075 119.126,86.098 DS18B20.1@125.319,79.905 125.319,77.5 125.603,77.216 ; 119.888,92.837 126.111,92.837 ; 122.301,92.672 ccw(c123.02,92.672) 122.512,92.163 cw(c123.02,92.672) 122.301,92.672 ; 122.301,92.672 cw(c121.581,92.672) 122.09,92.163 ccw(c121.581,92.672) 122.301,92.672 ; R5.2@124.123,62.067 cw(c123.813,61.57) 124.399,61.57 ; R5.2@124.123,62.067 cw(c123.813,61.57) 124.399,61.57 ; R5.2@124.123,62.067 cw(c123.813,61.57) 124.399,61.57 ; R5.2@124.123,62.067 cw(c123.813,61.57) 124.399,61.57 ; 124.399,61.57 cw(c124.985,61.57) R5.2@124.675,62.067 ; 124.399,61.57 cw(c124.985,61.57) R5.2@124.675,62.067 ; 124.399,61.57 cw(c124.985,61.57) R5.2@124.675,62.067 ; 124.399,61.57 cw(c124.985,61.57) R5.2@124.675,62.067 ; 124.399,61.57 R5.2@124.399,62.611 124.399,73.152 126.812,75.565 1.2@126.812,77.216 125.603,77.216 ; 126.111,92.837 126.492,92.456 ; 126.111,92.837 134.747,92.837 134.747,92.761 ; 126.492,92.456 ccw(c126.769,92.456) 126.635,92.213 cw(c126.769,92.456) 126.492,92.456 ; 126.492,92.456 cw(c126.215,92.456) 126.348,92.213 ccw(c126.215,92.456) 126.492,92.456 ; 130.81,92.507 ccw(c131.176,92.507) 130.974,92.201 cw(c131.176,92.507) 130.81,92.507 ; 130.81,92.507 cw(c130.443,92.507) 130.645,92.201 ccw(c130.443,92.507) 130.81,92.507 ; 130.81,92.507 131.064,92.761 134.747,92.761 ; 134.747,92.761 134.823,92.761 135.128,92.456 ; 135.128,92.456 ccw(c135.405,92.456) 135.271,92.213 cw(c135.405,92.456) 135.128,92.456 ; 135.128,92.456 cw(c134.851,92.456) 134.984,92.213 ccw(c134.851,92.456) 135.128,92.456 ; 126.203,92.745 cw(c125.575,92.117) 126.448,91.96 ccw(c125.575,92.117) 126.203,92.745 ; 126.546,92.402 cw(c126.157,92.013) 126.698,91.915 ccw(c126.157,92.013) 126.546,92.402 ; 134.885,92.699 cw(c134.342,92.156) 135.085,91.963 ccw(c134.342,92.156) 134.885,92.699 ; 135.199,92.385 cw(c134.841,92.027) 135.331,91.899 ccw(c134.841,92.027) 135.199,92.385
  Top Layer w0.5: +5V.1@45.633,100.036 ccw(c44.503,101.166) 46.101,101.166 ccw(c47.699,101.166) 46.569,100.036 ccw(c47.699,101.166) 47.699,99.568 ccw(c47.699,97.97) +5V.1@46.569,99.1 ; +5V.4@57.404,115.824 Download.2@86.741,115.824 ; +5V.4@57.758,115.47 cw(c58.611,114.617) 58.611,115.824 cw(c58.611,117.031) +5V.4@57.758,116.178 ; 58.163,108.842 cw(c55.493,106.172) KEY.2@59.269,106.172 ; 59.017,107.988 cw(c57.2,106.172) KEY.2@59.769,106.172 ; +5V.3@59.59,115.47 ccw(c58.737,114.617) 58.737,115.824 ccw(c58.737,117.031) +5V.3@59.59,116.178 ; 59.87,107.135 cw(c58.907,106.172) KEY.2@60.269,106.172 ; KEY.2@59.944,106.172 59.944,107.061 58.293,108.712 57.404,108.712 55.499,110.617 51.308,110.617 46.101,105.41 +5V.1@46.101,99.568 61.468,99.568 61.976,99.06 R1.1@61.976,97.978 64.074,97.978 64.135,97.917 64.135,92.608 62.459,90.932 ; +5V.3@60.298,115.47 cw(c61.151,114.617) 61.151,115.824 cw(c61.151,117.031) +5V.3@60.298,116.178 ; C1.1@61.519,89.992 62.459,90.932 ; C1.1@61.599,90.637 ccw(c61.728,91.663) 62.459,90.932 ; +5V.2@62.13,115.47 ccw(c61.277,114.617) 61.277,115.824 ccw(c61.277,117.031) +5V.2@62.13,116.178 ; C1.1@62.164,90.073 cw(c63.189,90.201) 62.459,90.932 ; +5V.2@62.838,115.47 cw(c63.691,114.617) 63.691,115.824 cw(c63.691,117.031) +5V.2@62.838,116.178 ; +5V.1@64.67,115.47 ccw(c63.817,114.617) 63.817,115.824 ccw(c63.817,117.031) +5V.1@64.67,116.178 ; +5V.1@65.378,115.47 cw(c66.231,114.617) 66.231,115.824 cw(c66.231,117.031) +5V.1@65.378,116.178 ; 85.354,115.824 cw(c85.354,114.183) Download.2@86.514,115.343 ; 85.968,115.824 ccw(c85.968,116.597) Download.2@86.514,116.051 ; 61.976,98.944 ccw(c62.942,98.944) 62.259,98.261 cw(c62.942,98.944) 61.976,98.944 ; 61.976,98.944 cw(c61.01,98.944) 61.693,98.261 ccw(c61.01,98.944) 61.976,98.944 ; 63.042,97.978 ccw(c63.042,97.012) 62.359,97.695 cw(c63.042,97.012) 63.042,97.978 ; 63.042,97.978 cw(c63.042,98.944) 62.359,98.261 ccw(c63.042,98.944) 63.042,97.978
  Bottom Layer w0.254: +5V.1@46.101,99.568 44.704,98.171 44.704,66.802 45.72,65.786 54.614,65.786 66.167,65.786 C2.1@67.437,64.516 ; S52.2@59.078,41.569 60.96,39.687 60.96,35.687 61.214,35.433 71.12,35.433 72.263,36.576 JP3.2@72.263,49.149 ; C6.2@65.278,84.836 72.644,77.47 JP1.2@72.644,74.676 ; 24C02.8@123.826,59.559 123.826,59.181 125.095,57.912 135.636,57.912 136.398,58.674 139.192,58.674 140.843,60.325 ; v1(140.843,61.341) 140.843,60.325 ; JP8.15@156.083,81.788 157.48,83.185 157.48,90.297 JP9.19@159.131,91.948 ; 44.761,98.228 ccw(c43.421,99.568) 45.316,99.568 cw(c43.421,99.568) 44.761,98.228 ; 44.761,98.228 cw(c46.101,96.888) 46.101,98.783 ccw(c46.101,96.888) 44.761,98.228 ; 45.195,98.662 ccw(c44.288,99.568) 45.57,99.568 cw(c44.288,99.568) 45.195,98.662 ; 45.195,98.662 cw(c46.101,97.755) 46.101,99.037 ccw(c46.101,97.755) 45.195,98.662 ; 65.928,84.186 ccw(c65.278,83.535) 65.278,84.455 cw(c65.278,83.535) 65.928,84.186 ; 65.928,84.186 cw(c66.579,84.836) 65.659,84.836 ccw(c66.579,84.836) 65.928,84.186 ; 66.353,65.6 ccw(c67.437,66.684) 67.437,65.151 cw(c67.437,66.684) 66.353,65.6 ; 66.353,65.6 cw(c65.269,64.516) 66.802,64.516 ccw(c65.269,64.516) 66.353,65.6 ; 66.362,83.752 ccw(c65.278,82.668) 65.278,84.201 cw(c65.278,82.668) 66.362,83.752 ; 66.362,83.752 cw(c67.446,84.836) 65.913,84.836 ccw(c67.446,84.836) 66.362,83.752 ; 66.787,65.166 ccw(c67.437,65.817) 67.437,64.897 cw(c67.437,65.817) 66.787,65.166 ; 66.787,65.166 cw(c66.136,64.516) 67.056,64.516 ccw(c66.136,64.516) 66.787,65.166 ; 72.263,47.645 ccw(c70.759,47.645) 71.822,48.708 cw(c70.759,47.645) 72.263,47.645 ; 72.263,47.645 cw(c73.767,47.645) 72.704,48.708 ccw(c73.767,47.645) 72.263,47.645 ; 72.263,48.258 ccw(c71.372,48.258) 72.002,48.888 cw(c71.372,48.258) 72.263,48.258 ; 72.263,48.258 cw(c73.154,48.258) 72.524,48.888 ccw(c73.154,48.258) 72.263,48.258 ; 72.644,75.567 ccw(c73.535,75.567) 72.905,74.937 cw(c73.535,75.567) 72.644,75.567 ; 72.644,75.567 cw(c71.753,75.567) 72.383,74.937 ccw(c71.753,75.567) 72.644,75.567 ; 72.644,76.18 ccw(c74.148,76.18) 73.085,75.117 cw(c74.148,76.18) 72.644,76.18 ; 72.644,76.18 cw(c71.14,76.18) 72.203,75.117 ccw(c71.14,76.18) 72.644,76.18 ; 140.843,60.325 ccw(c140.081,60.325) 140.538,60.935 cw(c140.081,60.325) 140.843,60.325 ; 140.843,60.325 cw(c141.605,60.325) 141.148,60.935 ccw(c141.605,60.325) 140.843,60.325 ; 156.713,82.418 ccw(c157.343,81.788) 156.452,81.788 cw(c157.343,81.788) 156.713,82.418 ; 156.713,82.418 cw(c156.083,83.048) 156.083,82.157 ccw(c156.083,83.048) 156.713,82.418 ; 157.147,82.852 ccw(c158.21,81.788) 156.706,81.788 cw(c158.21,81.788) 157.147,82.852 ; 157.147,82.852 cw(c156.083,83.915) 156.083,82.411 ccw(c156.083,83.915) 157.147,82.852 ; 158.067,90.884 ccw(c157.004,91.948) 158.508,91.948 cw(c157.004,91.948) 158.067,90.884 ; 158.067,90.884 cw(c159.131,89.821) 159.131,91.325 ccw(c159.131,89.821) 158.067,90.884 ; 158.501,91.318 ccw(c157.871,91.948) 158.762,91.948 cw(c157.871,91.948) 158.501,91.318 ; 158.501,91.318 cw(c159.131,90.688) 159.131,91.579 ccw(c159.131,90.688) 158.501,91.318 ; S52.2@59.278,40.896 cw(c59.278,39.754) 60.085,40.562 ccw(c59.278,39.754) S52.2@59.278,40.896 ; S52.2@59.697,41.569 ccw(c61.191,41.569) 60.135,40.512 cw(c61.191,41.569) S52.2@59.697,41.569 ; S52.2@59.951,41.569 ccw(c62.059,41.569) 60.568,40.079 cw(c62.059,41.569) S52.2@59.951,41.569 ; 24C02.8@123.826,58.899 cw(c123.826,58.217) 124.308,58.699 ccw(c123.826,58.217) 24C02.8@123.826,58.899 ; 24C02.8@124.055,59.381 ccw(c125.09,59.381) 124.358,58.649 cw(c125.09,59.381) 24C02.8@124.055,59.381 ; 24C02.8@124.309,59.381 ccw(c125.957,59.381) 124.791,58.216 cw(c125.957,59.381) 24C02.8@124.309,59.381
  Bottom Layer w0.5: 45.72,65.786 44.704,65.786 ; MAX232.16@54.36,67.057 54.36,66.04 54.614,65.786 ; S52.2@59.078,41.569 57.387,39.878 45.847,39.878 43.688,42.037 43.688,64.77 44.704,65.786 ; KEY.2@59.944,106.172 65.024,111.252 +5V.1@65.024,115.824 ; 66.167,65.786 54.614,65.786 ; Download.2@86.868,115.697 89.281,118.11 v1(100.838,118.11) ; 44.704,65.786 54.614,65.786 ; 54.36,66.152 ccw(c53.454,66.152) 54.095,66.792 cw(c53.454,66.152) 54.36,66.152 ; 54.36,66.152 cw(c55.265,66.152) 54.625,66.792 ccw(c55.265,66.152) 54.36,66.152 ; 61.096,107.324 ccw(c62.249,106.172) 60.619,106.172 cw(c62.249,106.172) 61.096,107.324 ; 61.096,107.324 cw(c59.944,108.477) 59.944,106.847 ccw(c59.944,108.477) 61.096,107.324 ; 65.024,114.617 ccw(c63.817,114.617) 64.67,115.47 cw(c63.817,114.617) 65.024,114.617 ; 65.024,114.617 cw(c66.231,114.617) 65.378,115.47 ccw(c66.231,114.617) 65.024,114.617 ; 87.722,116.551 ccw(c88.575,115.697) 87.368,115.697 cw(c88.575,115.697) 87.722,116.551 ; 87.722,116.551 cw(c86.868,117.404) 86.868,116.197 ccw(c86.868,117.404) 87.722,116.551 ; 99.909,118.11 ccw(c99.909,119.039) 100.566,118.382 cw(c99.909,119.039) 99.909,118.11 ; 99.909,118.11 cw(c99.909,117.181) 100.566,117.838 ccw(c99.909,117.181) 99.909,118.11 ; 57.798,40.289 ccw(c56.517,41.569) 58.328,41.569 cw(c56.517,41.569) 57.798,40.289 ; 58.281,40.772 cw(c58.878,40.174) 58.878,41.019 ccw(c58.878,40.174) 58.281,40.772
VO: 
X1: CX1.1 MCU.19 Y.1 | length 31.5
  Top Layer w0.254: CX1.1@74.676,36.83 77.47,36.83 Y.1@78.74,38.1 82.423,41.783 82.423,45.72 83.058,46.355 ; CX1.1@74.937,36.569 cw(c75.567,35.939) 75.567,36.83 cw(c75.567,37.721) CX1.1@74.937,37.091 ; CX1.1@75.117,36.389 cw(c76.18,35.326) 76.18,36.83 cw(c76.18,38.334) CX1.1@75.117,37.271 ; Y.1@78.105,38.1 cw(c76.572,38.1) 77.656,37.016 cw(c78.74,35.932) Y.1@78.74,37.465 ; Y.1@78.359,38.1 cw(c77.439,38.1) 78.09,37.45 cw(c78.74,36.799) Y.1@78.74,37.719 ; Y.1@78.74,38.481 ccw(c78.74,39.401) 79.39,38.75 ccw(c80.041,38.1) Y.1@79.121,38.1 ; Y.1@78.74,38.735 ccw(c78.74,40.268) 79.824,39.184 ccw(c80.908,38.1) Y.1@79.375,38.1 ; MCU.19@84.087,45.92 ccw(c83.058,44.921) 83.058,46.355 ; MCU.19@84.087,46.79 cw(c83.058,47.789) 83.058,46.355 ; MCU.19@84.269,46.096 ccw(c83.658,45.504) 83.658,46.355 ccw(c83.658,47.206) MCU.19@84.269,46.614 ; MCU.19@84.836,46.355 83.058,46.355
X2: CX2.1 MCU.18 Y.2 | length 29
  Top Layer w0.254: CX2.1@74.676,44.45 77.47,44.45 Y.2@78.74,43.18 81.915,46.355 81.915,47.752 83.058,48.895 ; CX2.1@74.937,44.189 cw(c75.567,43.559) 75.567,44.45 cw(c75.567,45.341) CX2.1@74.937,44.711 ; CX2.1@75.117,44.009 cw(c76.18,42.946) 76.18,44.45 cw(c76.18,45.954) CX2.1@75.117,44.891 ; Y.2@78.105,43.18 ccw(c76.572,43.18) 77.656,44.264 ccw(c78.74,45.348) 78.74,43.815 ccw(c78.74,45.348) 79.824,44.264 ccw(c80.908,43.18) Y.2@79.375,43.18 ; Y.2@78.359,43.18 ccw(c77.439,43.18) 78.09,43.83 ccw(c78.74,44.481) 78.74,43.561 ccw(c78.74,44.481) 79.39,43.83 ccw(c80.041,43.18) Y.2@79.121,43.18 ; MCU.18@84.087,48.46 ccw(c83.058,47.461) 83.058,48.895 ; MCU.18@84.087,49.33 cw(c83.058,50.329) 83.058,48.895 ; MCU.18@84.269,48.636 ccw(c83.658,48.044) 83.658,48.895 ccw(c83.658,49.746) MCU.18@84.269,49.154 ; MCU.18@84.836,48.895 83.058,48.895
pads on no net: AVR.3 AVR.4 Download.3 J61.1 J61.4 J61.6 J61.7 J61.8 J61.9 J61.10 J61.11 KEY.0 MAX232.7 MAX232.8 MAX232.9 MAX232.10 P2.0.3@109.355,42.331 P2.0.4@109.355,37.831 P2.1.3 P2.1.4 P2.2.3 P2.2.4 P2.3.3 P2.3.4 S52.3 S52.4 USB.2 USB.3 USB.5 USB.6

## Polygon pours and split planes (outlines as drawn)
no net on Top Layer (hatched 45Degree grid 0.508 track 0.203): 38.846,117.228 40.493,118.872 160.515,118.872 162.163,117.228 162.163,35.553 160.515,33.909 40.62,33.909 38.973,35.553 38.973,117.355
A on Bottom Layer (hatched 45Degree grid 0.508 track 0.203): 38.989,116.205 38.989,117.348 40.513,118.872 160.528,118.872 162.179,117.221 162.179,35.56 160.528,33.909 40.64,33.909 38.989,35.56